# EAGLE board USBGpibV1 (EAGLE 6.6.0)
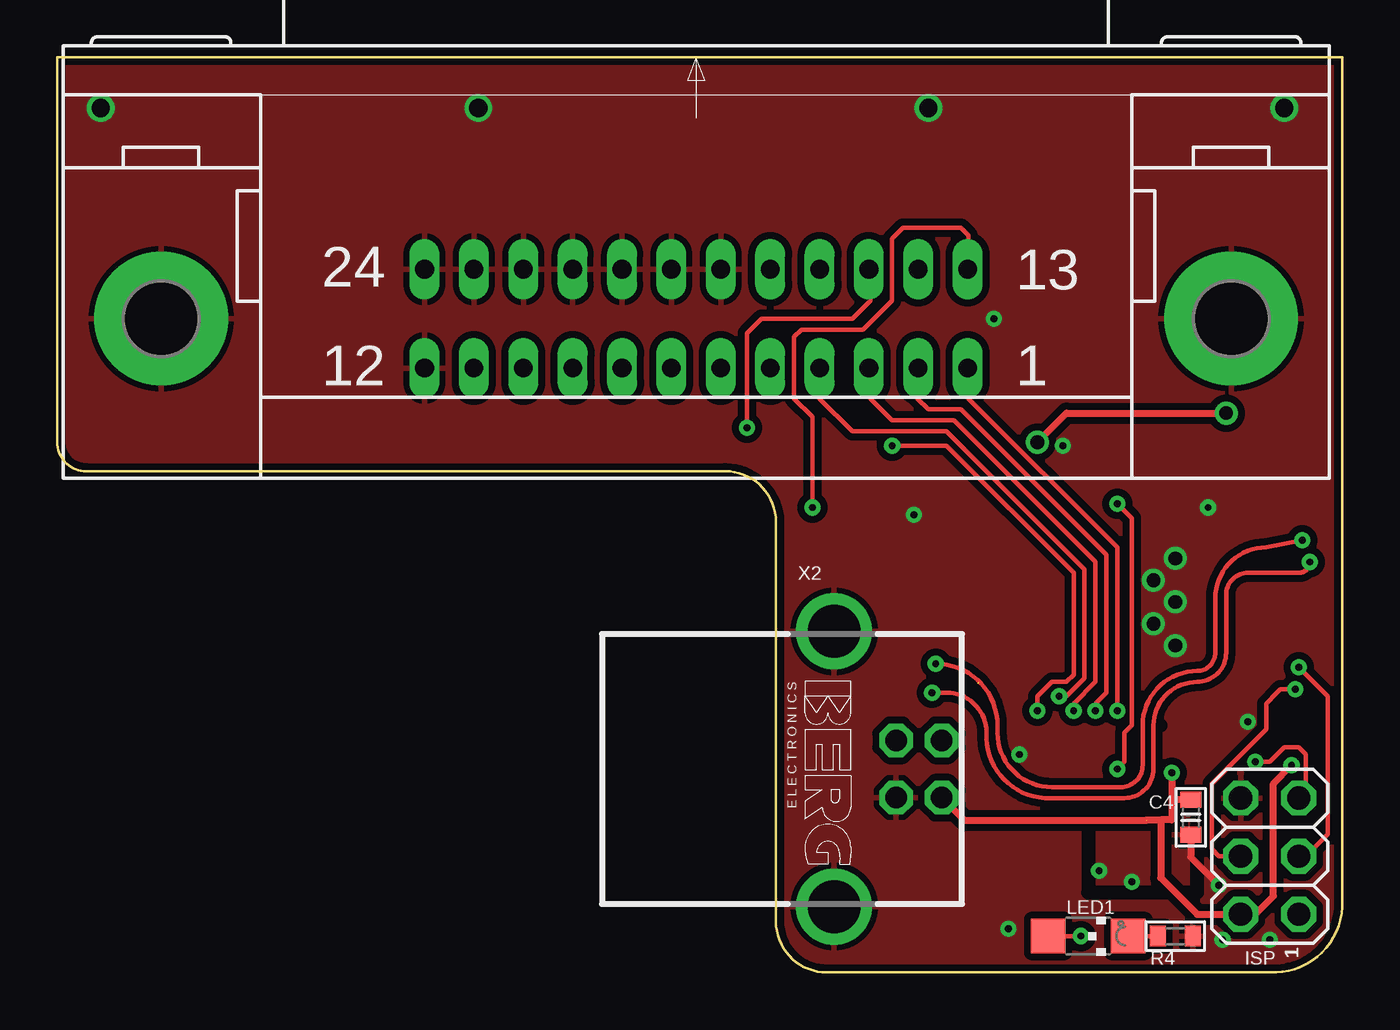
[diagram p0: board, top side]
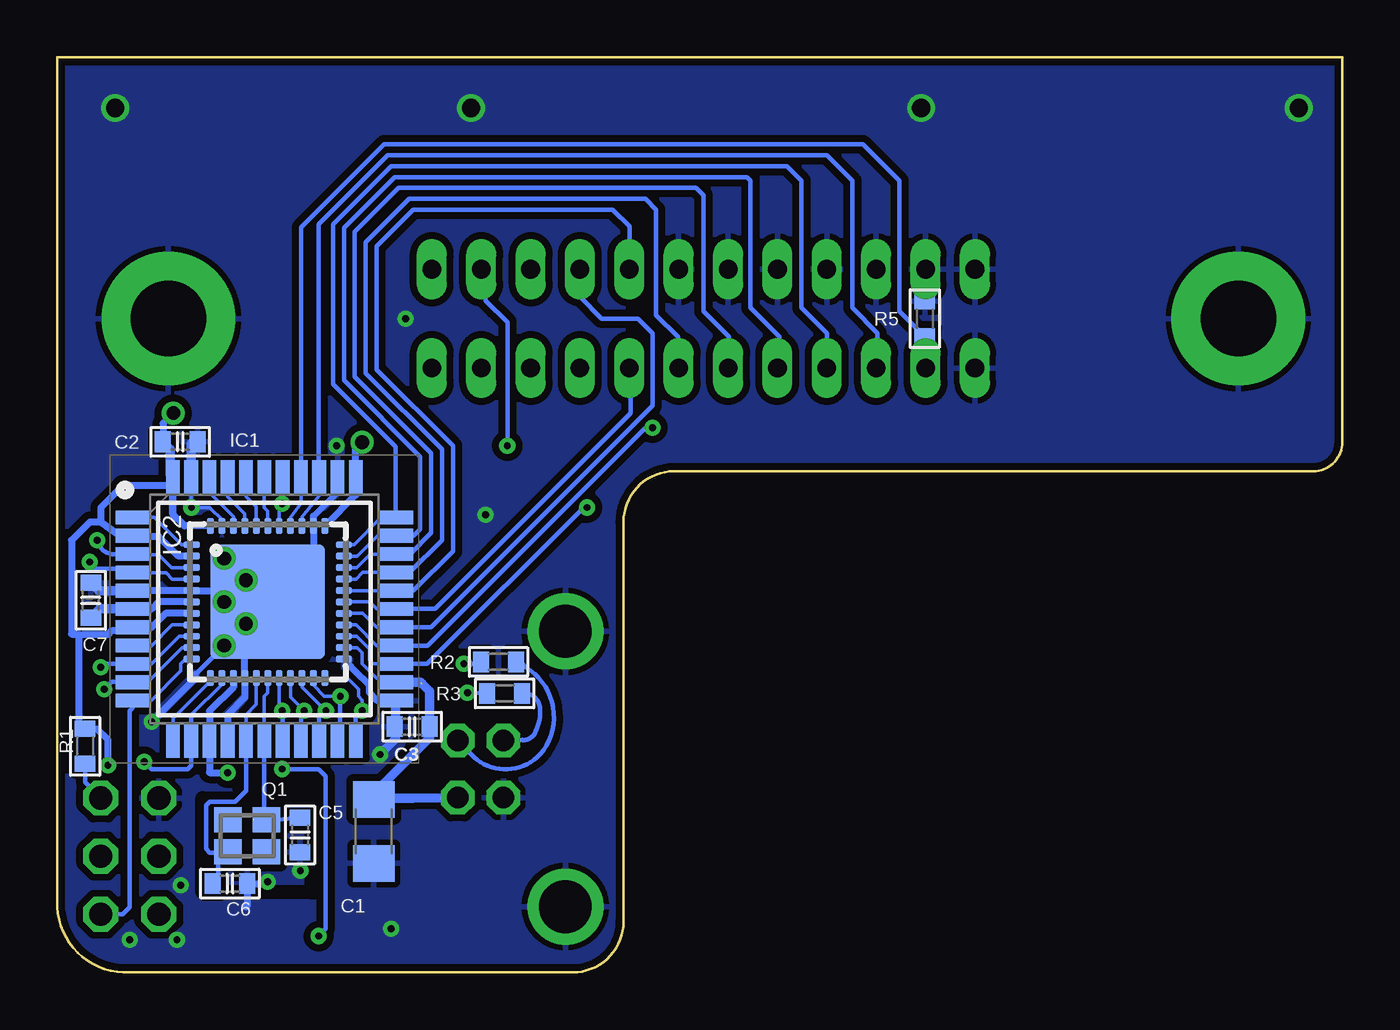
[diagram p1: board, bottom side, seen from below]

Size 56.2 x 40.01 mm. Coordinates in mm from the lower left corner, seen from the top.
Outline: 56.2,40.01 0,40.01 0,23.18 arc90 1.27,21.91 29.21,21.91 arc-90 31.43,19.69 31.43,2.22 arc90 33.66,0 53.02,0 arc90 56.2,2.86 56.2,40.01
Copper layers (1*16): Top 0.035mm / dielectric 1.5mm / Bottom 0.035mm
Design rules "default *": minimum track width 5.5mil, minimum drill 0.25mm, track to track 5.5mil, track to pad 5.5mil, pad to pad 5.5mil, via to via 5.5mil, smd to smd 0mil, copper to edge 0.01mm, drill to drill 5.5mil, minimum pad ring 10mil, minimum via ring 8mil, stop-mask expansion 4mil, vias tented up to drill 0.85mm, thermal gap 10mil
tRestrict: 9 lines
bRestrict: 9 lines

## Footprints (pad centres in the part's own frame; a part is rotated, then mirrored left to right if it is on the bottom)
C1206 = smd 1.6 x 1.8: 1 -1.4,0; 2 1.4,0
C0603 = smd 0.7 x 0.9: 1 -0.762,0; 2 0.762,0
QFP80P1200X1200X120-44N = smd 1.5 x 0.6: 1 -5.75,4; 2 -5.75,3.2; 3 -5.75,2.4; 4 -5.75,1.6; 5 -5.75,0.8; 6 -5.75,0; 7 -5.75,-0.8; 8 -5.75,-1.6; 9 -5.75,-2.4; 10 -5.75,-3.2; 11 -5.75,-4; 23 5.75,-4; 24 5.75,-3.2; 25 5.75,-2.4; 26 5.75,-1.6; 27 5.75,-0.8; 28 5.75,0; 29 5.75,0.8; 30 5.75,1.6; 31 5.75,2.4; 32 5.75,3.2; 33 5.75,4 | smd 0.6 x 1.5: 12 -4,-5.75; 13 -3.2,-5.75; 14 -2.4,-5.75; 15 -1.6,-5.75; 16 -0.8,-5.75; 17 0,-5.75; 18 0.8,-5.75; 19 1.6,-5.75; 20 2.4,-5.75; 21 3.2,-5.75; 22 4,-5.75; 34 4,5.75; 35 3.2,5.75; 36 2.4,5.75; 37 1.6,5.75; 38 0.8,5.75; 39 0,5.75; 40 -0.8,5.75; 41 -1.6,5.75; 42 -2.4,5.75; 43 -3.2,5.75; 44 -4,5.75
QFN44 = smd 0.7 x 0.3: 1 -3.325,2.5; 2 -3.325,2; 3 -3.325,1.5; 4 -3.325,1; 5 -3.325,0.5; 6 -3.325,0; 7 -3.325,-0.5; 8 -3.325,-1; 9 -3.325,-1.5; 10 -3.325,-2; 11 -3.325,-2.5; 23 3.325,-2.5; 24 3.325,-2; 25 3.325,-1.5; 26 3.325,-1; 27 3.325,-0.5; 28 3.325,0; 29 3.325,0.5; 30 3.325,1; 31 3.325,1.5; 32 3.325,2; 33 3.325,2.5 | smd 0.3 x 0.7: 12 -2.5,-3.325; 13 -2,-3.325; 14 -1.5,-3.325; 15 -1,-3.325; 16 -0.5,-3.325; 17 0,-3.325; 18 0.5,-3.325; 19 1,-3.325; 20 1.5,-3.325; 21 2,-3.325; 22 2.5,-3.325; 34 2.5,3.325; 35 2,3.325; 36 1.5,3.325; 37 1,3.325; 38 0.5,3.325; 39 0,3.325; 40 -0.5,3.325; 41 -1,3.325; 42 -1.5,3.325; 43 -2,3.325; 44 -2.5,3.325 | smd 5 x 5: TH 0,0
2X03 = drill 1.016 octagon: 1 -2.54,-1.27; 2 -2.54,1.27; 3 0,-1.27; 4 0,1.27; 5 2.54,-1.27; 6 2.54,1.27
CHIPLED_1206 = smd 1.5 x 1.5: A 0,-1.75; C 0,1.75
24HP_MALE = drill 0.813 long: 1 11.874,-2.159; 2 9.716,-2.159; 3 7.556,-2.159; 4 5.397,-2.159; 5 3.239,-2.159; 6 1.079,-2.159; 7 -1.079,-2.159; 8 -3.239,-2.159; 9 -5.397,-2.159; 10 -7.556,-2.159; 11 -9.716,-2.159; 12 -11.874,-2.159; 13 11.874,2.159; 14 9.716,2.159; 15 7.556,2.159; 16 5.397,2.159; 17 3.239,2.159; 18 1.079,2.159; 19 -1.079,2.159; 20 -3.239,2.159; 21 -5.397,2.159; 22 -7.556,2.159; 23 -9.716,2.159; 24 -11.874,2.159 | drill 3.302 pad 5.842: G -23.393,0; G1 23.393,0
FA-20H = smd 1.2 x 1.1: 1 -0.85,-0.7; 2 0.85,-0.7; 3 0.85,0.7; 4 -0.85,0.7
R0603 = smd 0.7 x 0.9: 1 -0.762,0; 2 0.762,0
PN61729-S = drill 0.95 octagon: 1 1.25,4.71; 2 -1.25,4.71; 3 -1.25,2.71; 4 1.25,2.71 | drill 2.3 pad 2.9: S1 -6.02,0; S2 6.02,0

## Placement (x,y rotation side)
C1  4u7  [C1206]  42.35,6.17 270 bottom
C2  100n  [C0603]  50.82,23.2 180 bottom
C3  100n  [C0603]  40.68,10.75 0 bottom
C4  100n  [C0603]  49.57,6.78 90 top
C5  22p  [C0603]  45.58,6.01 270 bottom
C6  22p  [C0603]  48.64,3.89 0 bottom
C7  1u  [C0603]  54.73,16.26 90 bottom
IC1  ATMEGA32U4-AU  [QFP80P1200X1200X120-44N]  47.14,15.89 0 bottom
IC2  ATMEGA16U4-AUQFN  [QFN44]  46.99,16.19 0 bottom
ISP  [2X03]  53.02,5.08 90 top
LED1  [CHIPLED_1206]  45.08,1.59 270 top
PL1  [24HP_MALE]  27.94,28.58 0 top
Q1  16MHz  [FA-20H]  47.89,5.97 180 bottom
R1  2k2  [R0603]  54.97,9.88 90 bottom
R2  22R  [R0603]  36.9,13.57 0 bottom
R3  22R  [R0603]  36.63,12.2 0 bottom
R4  180R  [R0603]  48.89,1.59 180 top
R5  100K  [R0603]  18.26,28.58 90 bottom
X2  PN61729-S  [PN61729-S]  33.97,8.89 270 top

## Library data of the parts
C1 = rcl
C2-C7 R1-R5 = KaiLib
IC1 = ATMEGA16U4-AU; DESCRIPTION: 8-bit Microcontrollers - MCU 16K Flsh, 1K EEPROM 2.5K SRAM; HEIGHT: 1.2mm; MANUFACTURER_NAME: Microchip; MANUFACTURER_PART_NUMBER: ATMEGA16U4-AU; MOUSER_PART_NUMBER: 556-ATMEGA16U4-AU; MOUSER_PRICE-STOCK: https://www.mouser.com/Search/Refine.aspx?Keyword=556-ATMEGA16U4-AU; RS_PART_NUMBER: 1773649P; RS_PRICE-STOCK: http://uk.rs-online.com/web/p/products/1773649P
IC2 = ATMEGA16U4-AU
ISP = pinhead
LED1 = led
PL1 = con-amp-champ
Q1 = crystal
X2 = con-berg; OC_FARNELL: unknown; OC_NEWARK: unknown

## Nets
+5V: C1.1 C2.2 C3.2 C4.2 IC1.2 IC1.7 IC1.14 IC1.24 IC1.34 IC1.44 IC2.2 IC2.7 IC2.14 IC2.24 IC2.34 IC2.44 ISP.2 R1.2 X2.1
ATN: IC1.37 IC2.37 PL1.11 R5.1
DAV: IC1.30 IC2.30 PL1.6
DIO1: IC1.18 IC2.18 PL1.1
DIO2: IC1.19 IC2.19 PL1.2
DIO3: IC1.20 IC2.20 PL1.3
DIO4: IC1.21 IC2.21 PL1.4
DIO5: IC1.25 IC2.25 PL1.13
DIO6: IC1.22 IC2.22 PL1.14
DIO7: IC1.26 IC2.26 PL1.15
DIO8: IC1.27 IC2.27 PL1.16
EOI: IC1.28 IC2.28 PL1.5
GND: C1.2 C2.1 C3.1 C4.1 C5.2 C6.2 C7.2 IC1.5 IC1.15 IC1.23 IC1.35 IC1.43 IC2.5 IC2.15 IC2.23 IC2.35 IC2.43 ISP.6 PL1.12 PL1.18 PL1.19 PL1.20 PL1.21 PL1.22 PL1.23 PL1.24 PL1.G PL1.G1 R4.1 R5.2 X2.4 X2.S1 X2.S2
IFC: IC1.33 IC2.33 PL1.9
N$1: C6.1 IC1.16 IC2.16 Q1.3
N$2: C5.1 IC1.17 IC2.17 Q1.1
N$3: C7.1 IC1.6 IC2.6
N$4: R2.2 X2.2
N$5: IC1.3 IC2.3 R2.1
N$6: IC1.4 IC2.4 R3.1
N$7: R3.2 X2.3
N$8: IC1.13 IC2.13 ISP.5 R1.1
N$9: LED1.C R4.2
N$10: IC1.10 IC2.10 ISP.4
N$11: IC1.9 IC2.9 ISP.3
N$12: IC1.11 IC2.11 ISP.1
N$13: IC1.38 IC2.38 LED1.A
N$14: IC1.1 IC2.1
N$15: IC1.8 IC2.8
N$16: IC1.12 IC2.12
N$17: IC1.42 IC2.42
N$18: IC1.41 IC2.41
N$19: IC1.40 IC2.40
N$20: IC1.39 IC2.39
NDAC: IC1.32 IC2.32 PL1.8
NRFD: IC1.31 IC2.31 PL1.7
REN: IC1.29 IC2.29 PL1.17
SRQ: IC1.36 IC2.36 PL1.10

## Tracks (layer width: path | path; a pad name or v marks a point on that pad's centre or on a via)
+5V  (via drill 0.3, 0.6)  (2 unrouted)
  Top 0.3: v53.97,9.05 53.18,8.26 53.18,3.34 52.39,2.54 ISP.2 49.85,2.54 48.26,4.13 48.26,6.67 | v42.86,23.18 44.13,24.45 v51.12,24.45 | X2.1 39.67,6.65 47.64,6.65 | v48.74,8.73 48.74,7.62 | 48.74,7.62 48.74,6.67 48.26,6.67 | 47.62,6.67 48.26,6.67 | C4.2 48.82,7.54 48.74,7.62
  Bottom 0.15: 52.85,19.05 IC1.2 | IC1.24 41.56,12.86 42.23,12.86 42.86,13.5 42.86,13.97 43.08,14.19 IC2.24
  Bottom 0.3: IC2.7 51.46,15.69 52.07,15.08 IC1.7 | IC1.7 | IC2.14 48.49,12.47 49.53,11.43 | 49.53,11.43 49.54,11.42 IC1.14 | IC2.34 43.14,20.87 IC1.34 43.14,22.9 v42.86,23.18 | IC2.44 50.63,19.52 51.14,20.03 | 51.14,20.03 IC1.44 | v51.12,24.45 51.57,24 C2.2 | 51.14,20.03 51.12,20.05 51.12,21.27 53.34,21.27 54.29,20.32 54.29,19.69 | 52.92,19.05 53.5,19.21 53.66,19.21 54.29,19.69 | 52.92,19.05 IC1.2 | IC1.7 53.34,15.08 53.5,14.92 53.82,14.92 53.97,14.77 55.07,14.77 55.22,14.77 | IC2.2 50.89,18.19 51.75,19.05 52.85,19.05 52.92,19.05 | 54.29,19.69 54.77,19.69 55.56,18.89 55.56,14.79 55.22,14.77 | 49.53,11.43 49.53,8.73 v48.74,8.73 | v53.97,9.05 53.97,10.16 54.45,10.64 R1.2 55.22,10.9 55.22,14.77
  Bottom 0.406: 49.62,10.05 IC1.14 | IC1.24 40.31,12.69 | 51.12,21.64 IC1.44 51.25,21.75 51.25,22.86 C2.2 | X2.1 39.03,7.64 40.64,7.62 42.3,7.62 C1.1 42.23,7.69 42.23,7.94 39.91,10.25 C3.2 39.91,12.29 40.24,12.62
ATN
  Bottom 0.15: IC1.37 45.54,20.5 45.99,19.89 IC2.37
  Bottom 0.2: IC1.37 45.54,32.57 41.91,36.2 20.95,36.2 19.37,34.61 19.37,28.89 18.26,27.78 | 18.26,27.78 18.26,26.45 PL1.11 | 18.26,27.99 R5.1 18.26,27.78
DAV
  Bottom 0.15: IC1.30 42.84,17.49 43.13,17.19 IC2.30
  Bottom 0.2: IC1.30 40.78,17.49 39.37,18.89 39.37,22.86 42.7,26.2 42.7,31.91 40.8,33.82 30.48,33.82 30,33.34 30,28.74 29.05,27.78 29.05,26.45 PL1.6
DIO1  (via drill 0.3)
  Top 0.2: v46.35,11.43 46.35,18.58 39.85,25.08 39.85,26.39 PL1.1
  Bottom 0.15: IC2.18 46.49,11.57 v46.35,11.43
  Bottom 0.2: IC1.18 46.34,11.42 v46.35,11.43
DIO2  (via drill 0.3)
  Top 0.2: v45.4,11.43 45.4,11.75 45.88,12.23 45.88,18.26 39.53,24.61 38.1,24.61 37.62,25.08 37.62,26.39 PL1.2
  Bottom 0.15: IC2.19 45.99,12.02 v45.4,11.43
  Bottom 0.2: IC1.19 45.54,11.3 v45.4,11.43
DIO3  (via drill 0.3)
  Top 0.2: v44.45,11.43 44.45,11.75 45.4,12.7 45.4,17.94 39.21,24.13 36.51,24.13 35.56,25.08 35.56,26.35 PL1.3
  Bottom 0.15: IC2.20 45.49,12.47 v44.45,11.43
  Bottom 0.2: IC1.20 44.74,11.14 v44.45,11.43
DIO4  (via drill 0.3)
  Top 0.2: v43.81,12.07 44.13,12.07 44.93,12.86 44.93,17.62 38.89,23.66 34.77,23.66 33.34,25.08 PL1.4
  Bottom 0.15: v43.81,12.07 44.51,12.07 44.99,12.54 IC2.21
  Bottom 0.2: IC1.21 43.94,10.67 43.81,10.8 v43.81,12.07
DIO5  (via drill 0.3)
  Top 0.2: v33.02,20.32 33.02,24.29 32.23,25.08 32.23,27.78 32.54,28.1 35.24,28.1 36.51,29.37 36.51,32.07 36.99,32.55 39.53,32.55 39.85,32.23 39.85,30.77 PL1.13
  Bottom 0.15: IC1.25 42.38,13.49 42.55,13.65 42.55,14.13 43.11,14.69 IC2.25
  Bottom 0.2: IC1.25 40.01,13.49 33.18,20.32 v33.02,20.32
DIO6  (via drill 0.3)
  Top 0.2: v42.86,11.43 42.86,12.07 43.5,12.7 44.13,12.7 44.45,13.02 44.45,17.46 38.89,23.02 v36.51,23.02
  Bottom 0.15: IC2.22 43.51,12.87 43.02,12.38 43.02,12.07 42.86,11.91 v42.86,11.43
  Bottom 0.2: IC1.22 43.14,11.16 v42.86,11.43 | v36.51,23.02 36.51,28.42 37.47,29.37 37.47,30.55 PL1.14
DIO7  (via drill 0.3)
  Top 0.2: v30.16,23.81 30.16,27.94 30.8,28.58 34.77,28.58 35.56,29.37 35.56,30.67 PL1.15
  Bottom 0.15: IC1.26 42.22,14.29 43.13,15.19 IC2.26
  Bottom 0.2: IC1.26 40.01,14.29 30.48,23.81 v30.16,23.81
DIO8
  Bottom 0.15: IC1.27 42.23,15.09 42.84,15.69 IC2.27
  Bottom 0.2: IC1.27 39.84,15.09 30.16,24.77 30.16,27.94 30.8,28.58 32.38,28.58 33.34,29.53 PL1.16
EOI
  Bottom 0.15: IC1.28 42.24,15.89 42.55,16.19 IC2.28
  Bottom 0.2: IC1.28 39.68,15.89 31.11,24.45 31.11,26.35 PL1.5
GND  (via drill 0.3, 0.6, 0.8)
  Top 0.3: C4.1 49.57,5.04 v50.8,3.81
  Bottom 0.15: IC2.43 48.99,19.78 49.53,20.32 v50.32,20.32 50.34,20.34 IC1.43
  Bottom 0.2: 50.16,13.02 v48.89,14.29
  Bottom 0.25: 43.94,20.99 44.99,19.94
  Bottom 0.3: IC1.5 IC2.5 49.39,16.69 v48.89,16.19 | IC1.15 48.74,11.27 47.99,12.02 IC2.15 47.99,15.24 v47.94,15.24 | IC1.35 43.94,20.99 | 44.99,19.94 IC2.35 44.99,17.88 45.72,17.15 v47.94,17.15 | IC1.23 42.21,11.89 42.55,12.23 42.55,12.54 43.18,13.18 arc4 IC2.23 | v46.99,3.97 47.08,3.88 C6.2 47.88,2.92 47.94,2.86 | v52.07,10.96 50.16,12.86 50.16,13.02
  Bottom 0.406: IC1.5 54.39,16.69 C7.2 | C2.1 50.32,23.13 50.34,23.12 IC1.43 | IC1.23 41.39,10.21 v42.07,9.53
  other vias: 1.91,37.78 18.41,37.78 38.1,37.78 53.66,37.78 43.97,23.02 37.47,20 50.96,1.43 45.56,4.45 53.02,1.43 41.59,1.91 40.96,28.58 48.89,18.1
  pour Bottom (isolate 0.305): 0,40.01 56.2,40.01 56.2,2.86 arc-90 53.34,0 33.66,0 arc-90 31.43,2.22 31.43,19.69 arc90 29.21,21.91 1.27,21.91 arc-90 0,23.18
  pour Top (isolate 0.305): 0,40.01 56.2,40.01 56.2,2.86 arc-90 53.34,0 33.66,0 arc-90 31.43,2.22 31.43,19.69 arc90 29.21,21.91 1.27,21.91 arc-90 0,23.18
IFC
  Bottom 0.15: IC1.33 42.03,19.89 43.22,18.69 IC2.33
  Bottom 0.2: IC1.33 41.39,22.98 44.13,25.72 44.13,32.7 41.59,35.24 24.29,35.24 23.65,34.61 23.65,29.05 22.54,27.94 PL1.9
N$1
  Bottom 0.15: IC2.16 47.49,11.73 47.94,11.27 IC1.16
  Bottom 0.2: IC1.16 47.94,7.94 48.42,7.46 49.53,7.46 49.69,7.3 49.69,5.4 49.53,5.24 48.77,5.24 Q1.3 49.16,4.85 49.16,4.13 C6.1
N$2
  Bottom 0.15: IC2.17 46.99,12.23 47.15,12.07 IC1.17
  Bottom 0.2: IC1.17 47.14,6.77 Q1.1 46.6,6.67 C5.1
N$3
  Bottom 0.3: IC2.6 51.75,16.19 52.07,15.88 52.88,15.88 IC1.6
  Bottom 0.406: IC1.6 54.34,15.89 C7.1
N$4
  Bottom 0.2: X2.2 38.1,9.53 arc-45 36.67,8.89 arc-51 35.08,9.53 arc-100 35.72,13.34 arc-54 R2.2
N$5  (via drill 0.3)
  Top 0.2: v38.42,13.5 arc-90 41.12,10.8 41.12,10.48 arc90 43.5,8.1 46.51,8.1 arc90 47.47,9.05 47.47,10.8 arc-90 49.85,13.18 arc90 50.64,13.97 50.64,16.35 arc-90 52.86,18.58 v54.45,18.89
  Bottom 0.15: IC2.3 51.19,17.69 51.75,18.26 52.86,18.26 IC1.3
  Bottom 0.2: R2.1 arc-90 37.89,13.5 v38.42,13.5 | v54.45,18.89 arc-90 53.53,18.29 IC1.3
N$6  (via drill 0.3)
  Top 0.2: v38.26,12.23 38.89,12.23 arc-90 40.64,10.48 arc90 43.18,7.62 46.67,7.62 arc90 47.94,8.89 47.94,10.8 arc-90 49.85,12.7 arc90 51.12,13.97 51.12,16.51 arc-90 52.07,17.46 54.29,17.46 arc90 v54.77,17.94
  Bottom 0.15: IC2.4 51.16,17.19 51.44,17.46 52.87,17.46 IC1.4
  Bottom 0.2: R3.1 37.59,12.2 v38.26,12.23 | IC1.4 53.52,17.64 54.47,17.64 arc90 v54.77,17.94
N$7
  Bottom 0.2: X2.3 35.88,10.16 arc-87 35.24,10.64 arc-31 35.08,11.59 arc-90 R3.2
N$8  (via drill 0.3)
  Top 0.2: v52.39,9.21 53.02,9.21 53.66,9.84 54.29,9.84 54.61,9.53 54.61,7.94 ISP.5
  Bottom 0.15: IC2.13 48.99,12.61 50.34,11.26
  Bottom 0.2: 50.34,11.26 IC1.13 50.34,9.04 50.48,8.89 52.07,8.89 v52.39,9.21 | R1.1 54.97,8.3 ISP.5
N$9
  Top 0.2: R4.2 LED1.C
N$10  (via drill 0.3)
  Top 0.2: v54.13,12.38 53.99,12.37 54.16,12.37 53.66,12.38 53.49,12.38 53.34,12.23 52.86,11.75 52.86,10.64 50.48,8.26 50.48,5.4 50.8,5.08 ISP.4
  Bottom 0.15: IC2.10 50.72,14.19 52.23,12.69 IC1.10
  Bottom 0.2: v54.13,12.38 53.82,12.7 52.87,12.7 IC1.10
N$11  (via drill 0.3)
  Top 0.2: v54.29,13.34 55.56,12.07 55.56,6.03 54.61,5.08 ISP.3
  Bottom 0.15: IC2.9 50.87,14.69 52.07,13.5 52.88,13.5 IC1.9
  Bottom 0.2: IC1.9 54.13,13.5 v54.29,13.34
N$12
  Bottom 0.15: IC2.11 50.6,13.69 50.8,13.5 50.8,13.18 52.07,11.91 52.87,11.91 IC1.11
  Bottom 0.2: IC1.11 52.89,11.57 53.02,11.43 53.02,2.86 53.34,2.54 ISP.1
N$13  (via drill 0.3)
  Top 0.2: 43.5,1.59 LED1.A v44.77,1.59 | v46.35,20.48 46.99,19.85 46.99,10.8 46.67,10.48 46.67,9.21 v46.35,8.89
  Bottom 0.15: IC2.38 46.49,20.35 v46.35,20.48
  Bottom 0.2: v46.35,20.48 46.35,21.62 IC1.38 | v46.35,8.89 44.77,8.89 44.45,8.57 44.45,1.91 v44.77,1.59
N$14
  Bottom 0.15: IC2.1 50.76,18.69 51.95,19.89 IC1.1
N$15
  Bottom 0.15: IC2.8 51.16,15.19 52.07,14.29 IC1.8
N$16
  Bottom 0.15: IC2.12 49.49,12.74 51.12,11.11 51.12,10.16 IC1.12
N$17
  Bottom 0.15: IC2.42 48.49,19.92 49.53,20.96 IC1.42
N$18
  Bottom 0.15: IC2.41 47.99,20.05 48.74,20.8 IC1.41
N$19
  Bottom 0.15: IC2.40 47.49,20.35 47.94,20.8 IC1.40
N$20
  Bottom 0.15: IC2.39 46.99,20.16 47.15,20.32 47.15,21.63 IC1.39
NDAC
  Bottom 0.15: IC1.32 42.19,19.09 43.08,18.19 IC2.32
  Bottom 0.2: IC1.32 40.61,19.09 40.32,19.37 40.32,22.54 43.66,25.88 43.66,32.55 41.43,34.77 26.03,34.77 25.88,34.61 25.88,29.05 24.61,27.78 24.61,26.51 PL1.8
NRFD
  Bottom 0.15: IC1.31 42.52,18.29 43.11,17.69 IC2.31
  Bottom 0.2: IC1.31 40.77,18.29 39.85,19.21 39.85,22.7 43.18,26.04 43.18,32.39 41.27,34.29 28.26,34.29 27.94,33.97 27.94,28.89 26.83,27.78 26.83,26.45 PL1.7
REN
  Bottom 0.15: IC1.29 43.66,16.69 IC2.29
  Bottom 0.2: IC1.29 40.62,16.69 38.89,18.42 38.89,23.02 42.23,26.35 42.23,31.75 40.64,33.34 31.91,33.34 31.18,32.61 PL1.17
SRQ
  Bottom 0.15: IC1.36 44.74,20.83 45.49,19.92 IC2.36
  Bottom 0.2: IC1.36 44.77,21.91 44.77,32.7 41.75,35.72 22.54,35.72 21.43,34.61 21.43,29.05 20.32,27.94 20.32,26.48 PL1.10

## Text on the board
tPlace: 1